# Altium PCB GSM-Board.PcbDoc
Units mm, origin at the board's own origin, x right, y up, seen from the top; angles counter-clockwise.
Board outline 40 x 40 mm, 2 copper layers (Top Layer, Bottom Layer), stack 1.571 mm thick; 22 components, 23 nets, 164 pads, 4 vias.
Unrouted connection lines stored in the file: 47.
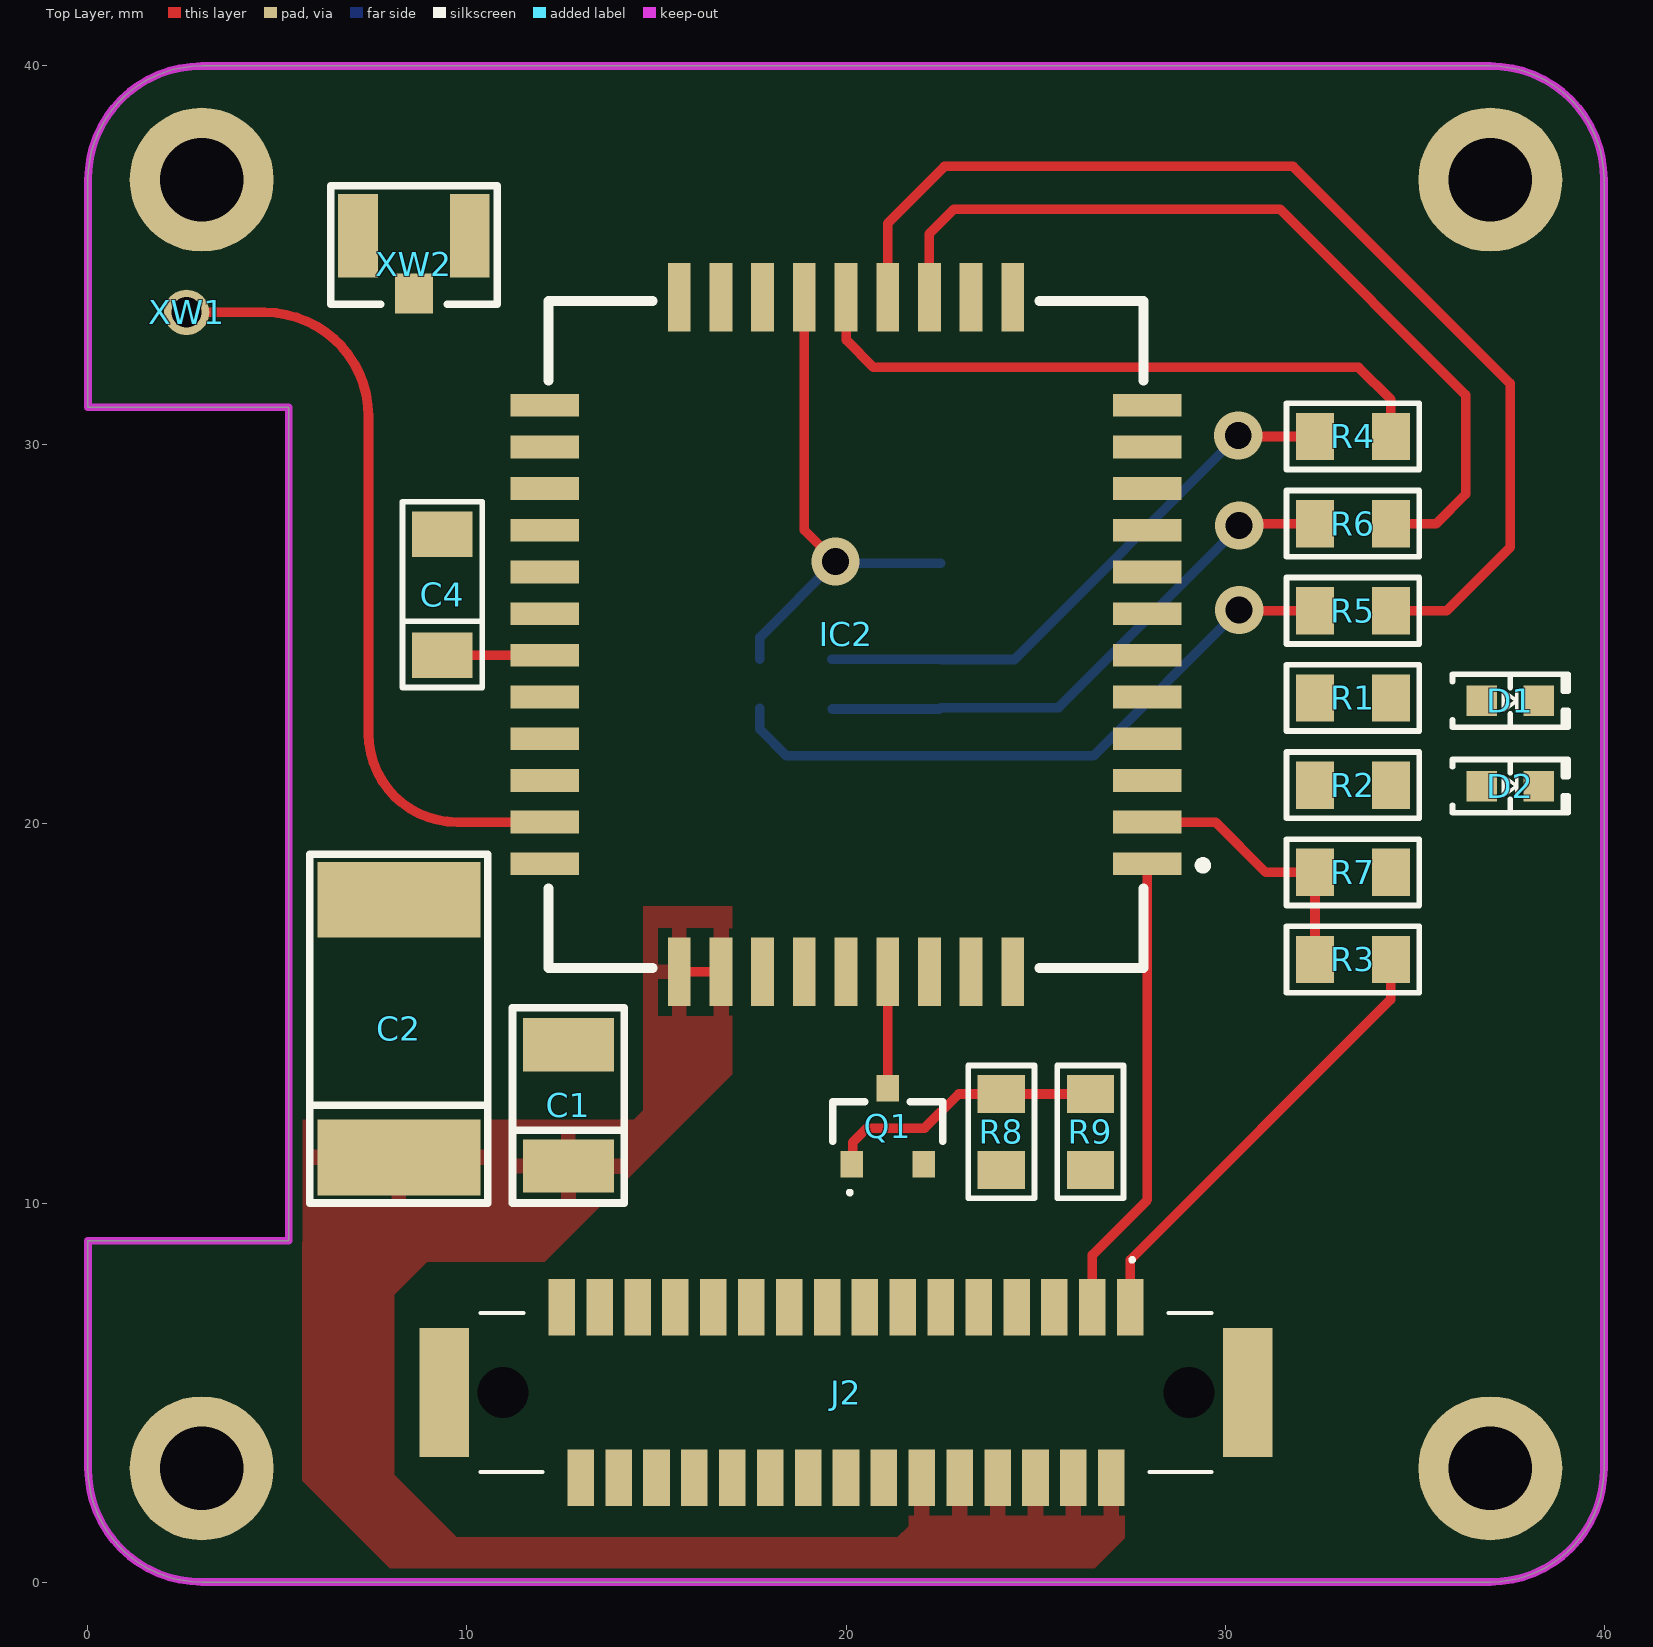
[diagram p0: Top Layer view]
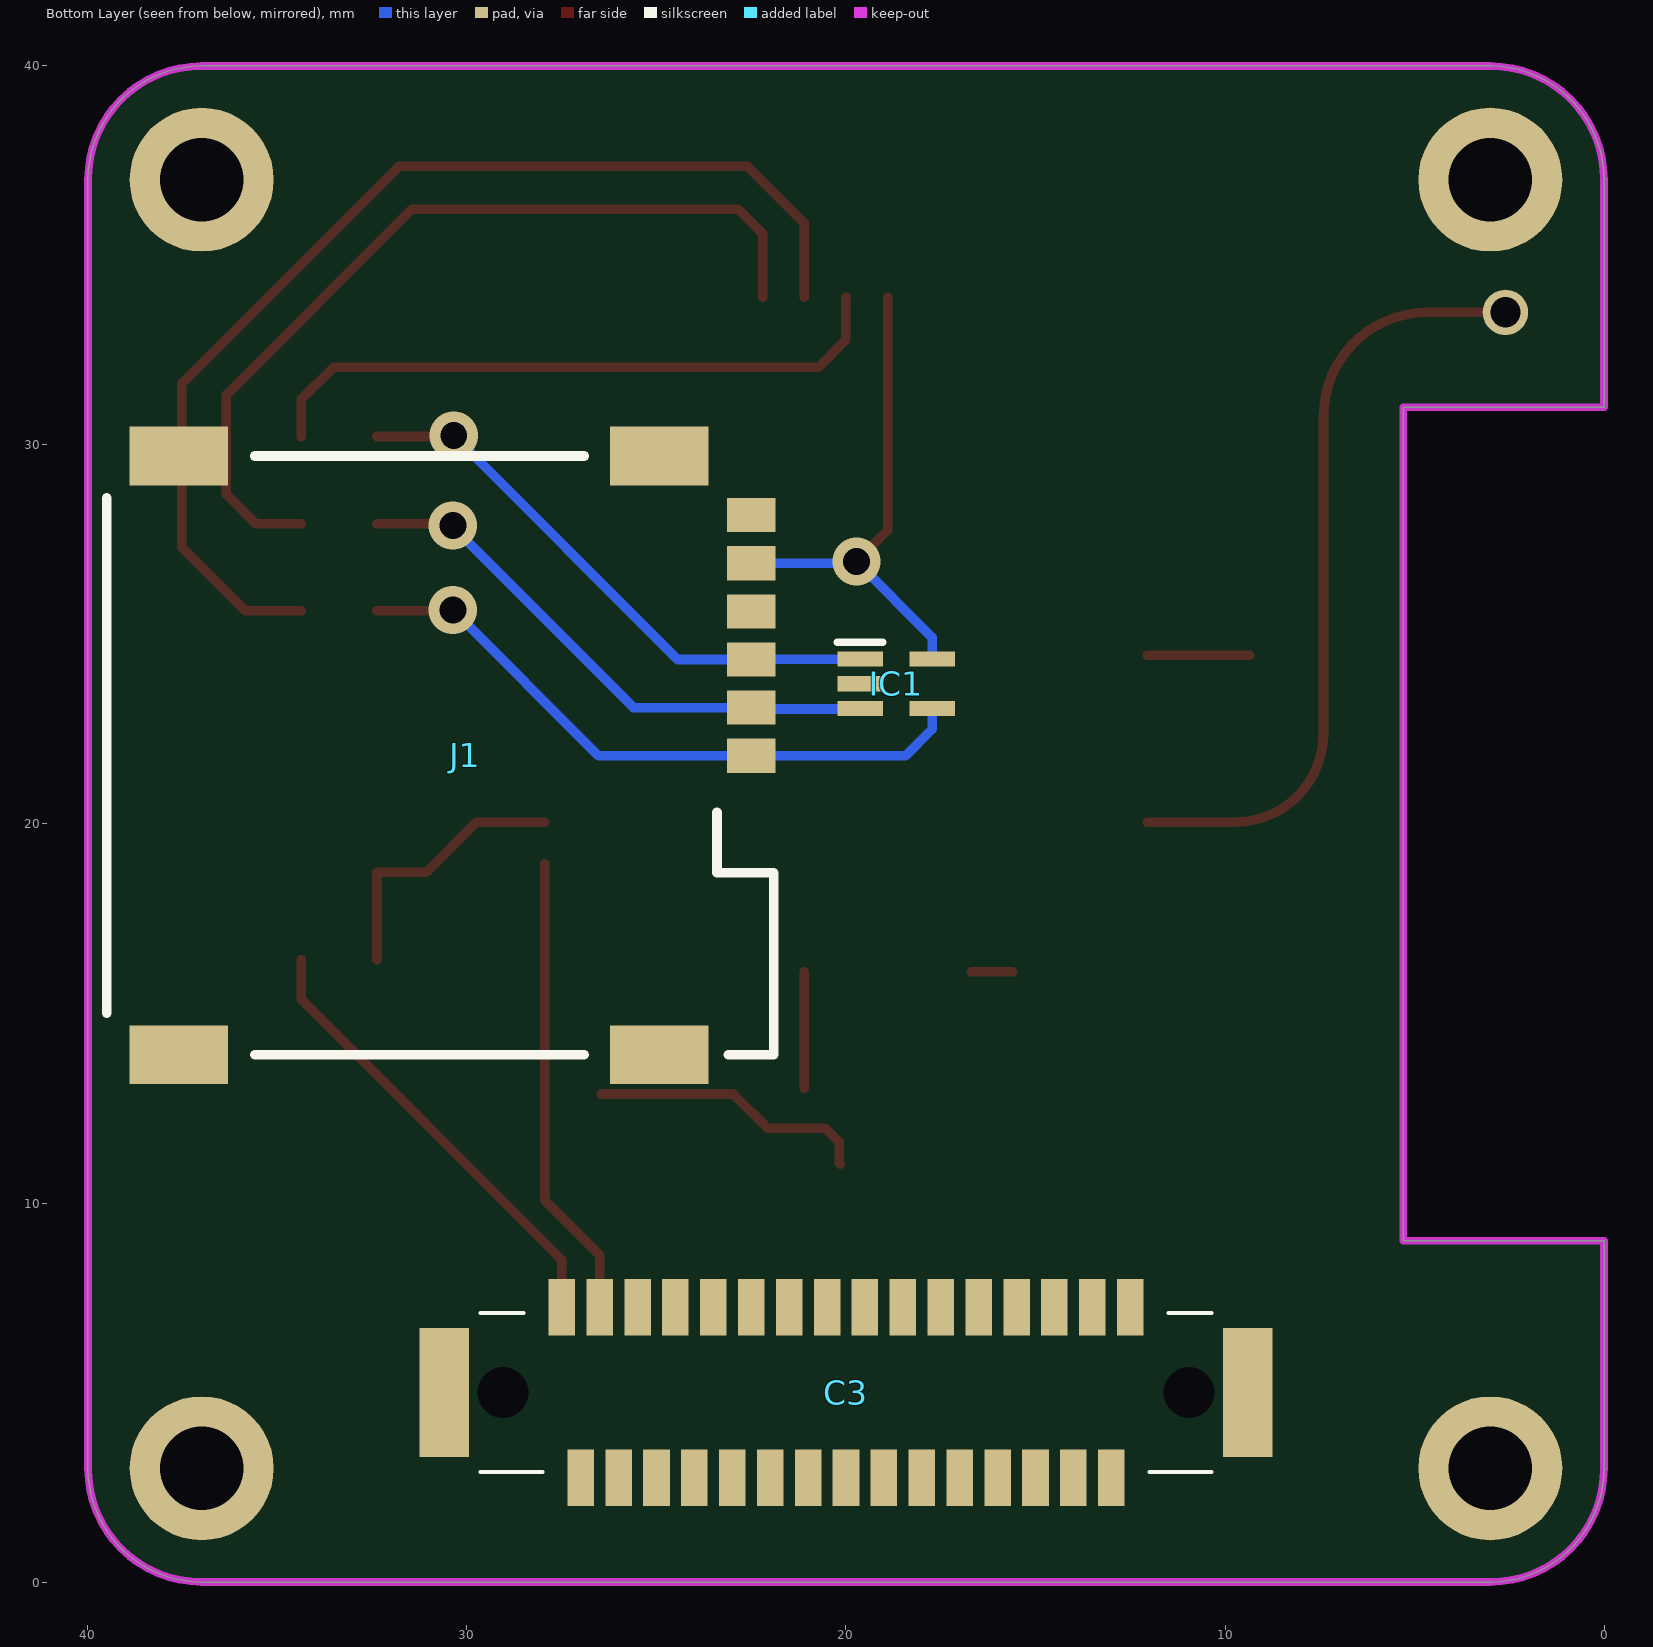
[diagram p1: Bottom Layer view, seen from below]

## Layer stack, top to bottom
Top Solder: solder mask 0.0102, Solder Resist, Dk 3.5
Top Layer: signal copper 0.0356
Dielectric 1: dielectric 1.5, FR-4, Dk 4.8
Bottom Layer: signal copper 0.0356
Bottom Solder: solder mask 0.0102, Solder Resist, Dk 3.5

## Board outline
0,3.8 0,9 5.3,9 5.3,31 0,31 0,37 cw(c3,37) 3,40 37,40 cw(c37,37) 40,37 40,3 cw(c37,3) 37,0 3,0 cw(c3,3) 0,3

## Design rules (kind name [scope] priority, off if disabled: settings)
Clearance [All] p1: gap=0.254 ignorepadtopadclearanceinfootprint=FALSE except(0: Arc-Hole Track-Hole SMDPad-Hole THPad-Hole Via-Hole Fill-Hole Poly-Hole Region-Hole Text-Hole)
ComponentClearance [All] p1: gap=0 collisioncheckmode=3 verticalgap=0 showdistances=FALSE
PolygonConnect PolygonConnect_1 [All vs InNet('VCC')] p1: connectstyle=Relief reliefconductorwidth=0.4 reliefentries=4 polygonreliefangle="90 Angle" airgapwidth=0.254
PolygonConnect [All] p2: connectstyle=Relief reliefconductorwidth=0.254 reliefentries=4 polygonreliefangle="90 Angle" airgapwidth=0.254
RoutingVias [All] p1: holewidth=0.711 width=1.27 viastyle="Through Hole" minholewidth=0.711 minwidth=1.27 maxholewidth=0.711 maxwidth=1.27
SolderMaskExpansion [All] p1: expansion=0.102 istentingtop=FALSE
Width VCC [InNet('VCC')] p1: maxlimit=0.5 minlimit=0.254 preferedwidth=0.254
Width [All] p2: maxlimit=0.254 minlimit=0.254 preferedwidth=0.254
29 further rules are at their usual default settings.

## Classes and differential pairs
component class GSM-Board: C1 C2 C4 D1 D2 IC1 IC2 J1 Q1 R1 R2 R3 R4 R5 R6 R7 R8 R9 XW1 XW2

## Components (designator, comment, footprint, x,y, rotation, side; value= is the part's Value field where it differs from the comment)
C1 "10uF" "CAP: TANTAL-B" 12.675,12.575 r90 top
C2 "100uF" "CAP: TANTAL-D" 8.2,14.6 r90 top
C3 "DF9-31S-1V_32_" DF931S1V32 20,5 r0 bottom
C4 "4.7uF" "CAP: TANTAL-A" 9.35,26.05 r90 top
D1 "=VALUE" "LED 0603_1608" 37.525,23.25 r0 top
D2 "=VALUE" "LED 0603_1608" 37.525,21 r0 top
IC1 "ESDALC6V1W5" SOT65P210X110-5N 18.675,23.7 r180 bottom
IC2 "SIM800C" SIM800C 20,25 r180 top
J1 "TFP09-2-12B" SIMHOLDER 37.605,29.71 r270 bottom
J2 "DF9-31P-1V_32_" DF931P1V32 20,5 r180 top
Q1 "BC817-40,215" BC81740215 21.1,12.025 r0 top
R1 "Resistor film, 1k, , 0201, 0.05W, -55...+125°C" "RES: 0805" 33.375,23.325 r0 top value=1k
R2 "Resistor film, 1k, , 0201, 0.05W, -55...+125°C" "RES: 0805" 33.375,21.025 r0 top value=1k
R3 "Resistor film, 1k, , 0201, 0.05W, -55...+125°C" "RES: 0805" 33.375,16.425 r0 top value=1k
R4 "Resistor film, 100R, , 0201, 0.05W, -55...+125°C" "RES: 0805" 33.375,30.225 r180 top value=100R
R5 "Resistor film, 100R, , 0201, 0.05W, -55...+125°C" "RES: 0805" 33.375,25.625 r180 top value=100R
R6 "Resistor film, 100R, , 0201, 0.05W, -55...+125°C" "RES: 0805" 33.375,27.925 r180 top value=100R
R7 "Resistor film, 5.6k, , 0201, 0.05W, -55...+125°C" "RES: 0805" 33.375,18.725 r180 top value=5.6k
R8 "Resistor film, 4.7k, , 0201, 0.05W, -55...+125°C" "RES: 0805" 24.1,11.875 r270 top value=4.7k
R9 "Resistor film, 47k, , 0201, 0.05W, -55...+125°C" "RES: 0805" 26.45,11.875 r90 top value=47k
XW1 "=VALUE" ANT_HOLE 2.6,33.5 r270 top
XW2 "=VALUE" "CON: U.FL" 8.6,35.525 r0 top

## Footprints (in the part's own frame and the unit in brackets; to place one, negate y for a bottom-side part, rotate by r counter-clockwise, add the part's x,y. Pads: shape width x height; smd on the part's side, far side on the other; paste and mask are expansions set on the pad)
ANT_HOLE [mm]
  round 1.2 hole 0.8: 1(0,0)
  body extent -0.4,-2.49 23.59,2.49, height 3.29
BC81740215 [mm]
  rect 0.6x0.7 smd: 1(-0.95,-1) 2(0.95,-1) 3(0,1)
  silkscreen extent -1.45,-1.8 1.45,0.65, body extent -1.45,-1.2 1.45,1.2, height 0.91
"CAP: TANTAL-A" [mm]
  rect 1.2x1.6 smd: 1(-1.6,0) 2(1.6,0)
  silkscreen extent -2.45,-1.05 2.45,1.05, body extent -1.7,-0.84 1.7,0.84, height 1.71
"CAP: TANTAL-B" [mm]
  rect 1.4x2.4 smd: 1(-1.6,0) 2(1.6,0)
  silkscreen extent -2.58,-1.48 2.58,1.48, body extent -1.85,-1.46 1.85,1.47, height 2.03
"CAP: TANTAL-D" [mm]
  rect 2x4.3 smd: 1(-3.4,0) 2(3.4,0)
  silkscreen extent -4.6,-2.35 4.6,2.35, body extent -3.7,-2.22 3.7,2.23, height 3.01
"CON: U.FL" [mm]
  rect 1x1.05 smd: 1(0,-1.525)
  rect 1.05x2.2 smd: 2(-1.475,0) 2(1.475,0)
  silkscreen extent -2.2,-1.81 2.2,1.31, body extent -1.5,-1.71 1.5,1.14, height 1.27
DF931P1V32 [mm]
  rect 0.7x1.5 smd: 1(-7.5,-2.25) 2(-7,2.25) 3(-6.5,-2.25) 4(-6,2.25) 5(-5.5,-2.25) 6(-5,2.25) 7(-4.5,-2.25) 8(-4,2.25) 9(-3.5,-2.25) 10(-3,2.25) 11(-2.5,-2.25) 12(-2,2.25) 13(-1.5,-2.25) 14(-1,2.25) 15(-0.5,-2.25) 16(0,2.25) 17(0.5,-2.25) 18(1,2.25) 19(1.5,-2.25) 20(2,2.25) 21(2.5,-2.25) 22(3,2.25) 23(3.5,-2.25) 24(4,2.25) 25(4.5,-2.25) 26(5,2.25) 27(5.5,-2.25) 28(6,2.25) 29(6.5,-2.25) 30(7,2.25) 31(7.5,-2.25)
  round 0.675 hole 1.35 unplated: MH1(-9.05,0) MH2(9.05,0)
  rect 1.3x3.4 smd: MP1(-10.6,0) MP2(10.6,0)
  silkscreen extent -9.65,-3.55 9.65,2.1, body extent -10.55,-2.81 10.55,2.79, height 3.29
DF931S1V32 [mm]
  rect 0.7x1.5 smd: 1(-7.5,-2.25) 2(-7,2.25) 3(-6.5,-2.25) 4(-6,2.25) 5(-5.5,-2.25) 6(-5,2.25) 7(-4.5,-2.25) 8(-4,2.25) 9(-3.5,-2.25) 10(-3,2.25) 11(-2.5,-2.25) 12(-2,2.25) 13(-1.5,-2.25) 14(-1,2.25) 15(-0.5,-2.25) 16(0,2.25) 17(0.5,-2.25) 18(1,2.25) 19(1.5,-2.25) 20(2,2.25) 21(2.5,-2.25) 22(3,2.25) 23(3.5,-2.25) 24(4,2.25) 25(4.5,-2.25) 26(5,2.25) 27(5.5,-2.25) 28(6,2.25) 29(6.5,-2.25) 30(7,2.25) 31(7.5,-2.25)
  rect 1.3x3.4 smd: MP1(-10.6,0) MP2(10.6,0)
  silkscreen extent -9.65,-2.1 9.65,2.1, body extent -10.55,-2.81 10.55,2.79, height 3.3
"LED 0603_1608" [mm] "Chip Diode, 2-Leads, Body 1.60x0.80mm, IPC Medium Density"
  rect 0.8x0.8 smd: 1(-0.75,0) 2(0.75,0)
  silkscreen extent -1.52,-0.7 1.52,0.7, body extent -0.8,-0.4 0.8,0.4, height 0.53
"RES: 0805" [mm]
  rect 1x1.25 smd: 1(-1,0) 2(1,0)
  silkscreen extent -1.75,-0.87 1.75,0.87, body extent -1,-0.6 1,0.6, height 0.48
SIM800C [mm]
  rect 1.8x0.6 smd: 1(-7.95,6.05) 2(-7.95,4.95) 3(-7.95,3.85) 4(-7.95,2.75) 5(-7.95,1.65) 6(-7.95,0.55) 7(-7.95,-0.55) 8(-7.95,-1.65) 9(-7.95,-2.75) 10(-7.95,-3.85) 11(-7.95,-4.95) 12(-7.95,-6.05) 22(7.95,-6.05) 23(7.95,-4.95) 24(7.95,-3.85) 25(7.95,-2.75) 26(7.95,-1.65) 27(7.95,-0.55) 28(7.95,0.55) 29(7.95,1.65) 30(7.95,2.75) 31(7.95,3.85) 32(7.95,4.95) 33(7.95,6.05)
  rect 0.6x1.8 smd: 13(-4.4,-8.9) 14(-3.3,-8.9) 15(-2.2,-8.9) 16(-1.1,-8.9) 17(0,-8.9) 18(1.1,-8.9) 19(2.2,-8.9) 20(3.3,-8.9) 21(4.4,-8.9) 34(4.4,8.9) 35(3.3,8.9) 36(2.2,8.9) 37(1.1,8.9) 38(0,8.9) 39(-1.1,8.9) 40(-2.2,8.9) 41(-3.3,8.9) 42(-4.4,8.9)
  silkscreen extent -9.51,-8.8 7.85,8.8, body extent -7.85,-8.8 7.85,8.8, height 2.3
SIMHOLDER [mm]
  rect 0.9x1.27 smd: 1(2.83,15.105) 2(5.37,15.105) 3(7.91,15.105) 5(1.56,15.105) 6(4.1,15.105) 7(6.64,15.105)
  rect 1.55x2.6 smd: MP1(0,0) MP2(15.8,0) MP3(0,12.68) MP4(15.8,12.68)
  silkscreen extent 0,-1.9 15.8,15.7, body extent -0.13,-1.65 15.97,13.55, height 1.85
SOT65P210X110-5N [mm]
  rect 1.2x0.4 smd: 1(-0.95,0.65) 2(-0.95,0) 3(-0.95,-0.65) 4(0.95,-0.65) 5(0.95,0.65)
  silkscreen extent -1.55,1.1 -0.35,1.1, body extent -1.05,-1 1.05,1, height 1.1

## Part data
C1 C2 C4: library part Capacitor_polar, "SMD Capacitor Polar"
C3: "Connector", Arrow Part Number=DF9-31S-1V(32), Manufacturer_Name=Hirose, Mouser Part Number=798-DF9-31S-1V32, Arrow Price/Stock=https://www.arrow.com/en/products/df9-31s-1v-32/hirose-electric, Datasheet Link=http://www.mouser.com/ds/2/185/DF9_catalog-939217.pdf, Height=3.3mm, Manufacturer_Part_Number=DF9-31S-1V(32), Mouser Price/Stock=https://www.mouser.co.uk/ProductDetail/Hirose-Connector/DF9-31S-1V32?qs=zOgoZG1CgI88k8P2oY2QVw%3D%3D
D1 D2: library part LED, "Chip LED"
IC1: "Integrated Circuit", Manufacturer_Name=STMicroelectronics, Mouser Part Number=511-ESDALC6V1W5, Arrow Part Number=ESDALC6V1W5, Arrow Price/Stock=https://www.arrow.com/en/products/esdalc6v1w5/stmicroelectronics?region=nac, Datasheet Link=http://www.st.com/web/en/resource/technical/document/datasheet/CD00002946.pdf, Height=1.1mm, Manufacturer_Part_Number=ESDALC6V1W5, Mouser Price/Stock=https://www.mouser.co.uk/ProductDetail/STMicroelectronics/ESDALC6V1W5?qs=C%2FEejvvdwQ4xcyFnfrFaDw%3D%3D
IC2: library part -SIM800C, "Integrated Circuit", Manufacturer_Name=SIMCOM, Datasheet Link=https://datasheet.lcsc.com/szlcsc/SIMCom-Wireless-Solutions-SIM800C-24Mbit_C69119.pdf, Manufacturer_Part_Number=-SIM800C
J1: "Connector", Manufacturer_Name=100y, Datasheet Link=http://images.100y.com.tw/pdf_file/10-TFP09-2-12B.pdf, Height=2.45mm, Manufacturer_Part_Number=TFP09-2-12B
J2: "Connector", Arrow Part Number=DF9-31P-1V(32), Manufacturer_Name=Hirose, Mouser Part Number=798-DF9-31P-1V32, Arrow Price/Stock=https://www.arrow.com/en/products/df9-31p-1v-32/hirose-electric, Datasheet Link=https://datasheet.datasheetarchive.com/originals/distributors/SFDatasheet-7/sf-000141250.pdf, Height=3.5mm, Manufacturer_Part_Number=DF9-31P-1V(32), Mouser Price/Stock=https://www.mouser.co.uk/ProductDetail/Hirose-Connector/DF9-31P-1V32?qs=zOgoZG1CgI9P5hPtT7oVcw%3D%3D
Q1: "Transistor BJT NPN", Manufacturer_Name=Nexperia, Mouser Part Number=771-BC817-40-T/R, Arrow Part Number=BC817-40,215, Arrow Price/Stock=https://www.arrow.com/en/products/bc817-40215/nexperia?region=nac, Datasheet Link=https://assets.nexperia.com/documents/data-sheet/BC817_SER.pdf, Height=1.1mm, Manufacturer_Part_Number=BC817-40,215, Mouser Price/Stock=https://www.mouser.co.uk/ProductDetail/Nexperia/BC817-40215?qs=me8TqzrmIYU%252B245p8hOLaQ%3D%3D
R1 R2 R3 R4 R5 R6 R7 R8 R9: library part Resistor, Manufacturer=Yageo, Package=0201, PartNumber=RC0201JR-07100RL, Power=0.05W, Temperature=-55...+125°C, TypeResistor="Resistor film", HelpURL=https://www.digikey.com/product-detail/en/yageo/RC0201JR-07100RL/311-100NCT-ND/1949006
  R1 R2 R3: ValueManufacturerPartNumber="Resistor film, 1k, , 0201, 0.05W, -55...+125°C"
  R4 R5 R6: ValueManufacturerPartNumber="Resistor film, 100R, , 0201, 0.05W, -55...+125°C"
  R7: ValueManufacturerPartNumber="Resistor film, 5.6k, , 0201, 0.05W, -55...+125°C"
  R8: ValueManufacturerPartNumber="Resistor film, 4.7k, , 0201, 0.05W, -55...+125°C"
  R9: ValueManufacturerPartNumber="Resistor film, 47k, , 0201, 0.05W, -55...+125°C"
XW1 XW2: library part "Connector RF"

## Free pads (board coordinates)
  round 3.8 hole 2.2: 5(3,3) 5(3,37) 5(37,3) 5(37,37)

## Via types
v1: diameter 1.27, hole 0.711, Top Layer to Bottom Layer, 4 vias

## Nets (pads, with @x,y where several pads share a name; then routed paths per layer and width w, separated by ;. In a path a pad name is that pad's centre, name@x,y a point inside that pad or via, vN(x,y) a via of type N, cw(c..) or ccw(c..) an arc to the next point about the centre after c; other vN are vias at no path point)
GND: C1.2 C2.2 C3.2 C3.4 C3.6 C3.8 C3.10 C3.12 C4.2 D1.2 D2.2 IC1.2 IC2.8 IC2.13 IC2.19 IC2.21 IC2.27 IC2.30 IC2.31 IC2.33 IC2.36 IC2.37 J1.5 J1.MP1 J1.MP2 J1.MP3 J1.MP4 J2.20 J2.22 J2.24 J2.26 J2.28 J2.30 Q1.2 R7.1 R9.1
NetC4_1: C4.1 IC2.28 | length 2.7
  Top Layer w0.254: C4.1 IC2.28
NetD1_1: D1.1 R1.2
NetD2_1: D2.1 R2.2
NetIC1_1: IC1.1 J1.2 R4.2 | length 15.2
  Top Layer w0.254: v1(30.35,30.25) 30.375,30.225 R4.2
  Bottom Layer w0.254: IC1.1 J1.2@22.49,24.35 ; J1.2 24.44,24.34 v1(30.35,30.25)
NetIC1_3: IC1.3 J1.7 R6.2 | length 14.8
  Top Layer w0.254: v1(30.375,27.875) 30.425,27.925 R6.2
  Bottom Layer w0.254: IC1.3@19.641,23.034 22.464,23.034 J1.7 25.606,23.07 30.375,27.839 v1(30.375,27.875)
NetIC1_4: IC1.4 J1.3 R5.2 | length 17.1
  Top Layer w0.254: v1(30.375,25.65) 30.4,25.625 R5.2
  Bottom Layer w0.254: IC1.4 17.725,22.5 18.425,21.8 J1.3 26.525,21.8 v1(30.375,25.65)
NetIC2_2: IC2.2 R3.1 R7.2 | length 7.3
  Top Layer w0.254: IC2.2 29.75,20.05 31.075,18.725 R7.2 R3.1
NetIC2_32: IC2.32 XW1.1 XW2.1 | length 20.7
  Top Layer w0.254: XW1.1 4.66,33.5 cw(c4.66,30.76) 7.4,30.76 7.4,22.39 ccw(c9.74,22.39) 9.74,20.05 IC2.32
NetIC2_41: IC2.41 R1.1
NetIC2_42: IC2.42 R2.1
NetQ1_1: Q1.1 R8.1 R9.2 | length 7.4
  Top Layer w0.254: Q1.1 20.182,11.057 20.182,11.607 20.55,11.975 22.075,11.975 22.975,12.875 R8.1 R9.2
PWRKEY: IC2.39 Q1.3 | length 3.1
  Top Layer w0.254: Q1.3 IC2.39
PWRKEY_MCU: C3.1 J2.31 R8.2
SIM_CLK: IC2.16 R5.1 | length 29.5
  Top Layer w0.254: IC2.16 21.1,35.85 22.6,37.35 31.8,37.35 37.525,31.625 37.525,27.3 35.85,25.625 R5.1
SIM_DATA: IC2.15 R6.1 | length 23
  Top Layer w0.254: IC2.15 22.2,35.576 22.849,36.225 31.45,36.225 36.35,31.325 36.35,28.7 35.575,27.925 R6.1
SIM_RST: IC2.17 R4.1 | length 17.1
  Top Layer w0.254: IC2.17 20.007,33.893 20.007,32.768 20.725,32.05 33.525,32.05 34.375,31.2 R4.1
SIM_VDD: IC1.5 IC2.18 J1.1 | length 13.5
  Top Layer w0.254: IC2.18 18.9,27.75 v1(19.725,26.925)
  Bottom Layer w0.254: IC1.5 17.725,24.925 v1(19.725,26.925) 19.77,26.88 J1.1
UART1_RX: C3.25 J2.7
UART1_TX: C3.27 J2.5
UART6_RX: C3.29 IC2.1 J2.3 | length 12.3
  Top Layer w0.254: J2.3 26.5,8.634 27.95,10.084 IC2.1
UART6_TX: C3.31 J2.1 R3.2 | length 12
  Top Layer w0.254: J2.1 27.5,8.5 34.371,15.371 R3.2@34.371,16.421
VCC: C1.1 C2.1 C3.20 C3.22 C3.24 C3.26 C3.28 C3.30 IC2.34 IC2.35 J2.2 J2.4 J2.6 J2.8 J2.10 J2.12 | length 1.1
  Top Layer w0.254: IC2.34 IC2.35
pads on no net: C3.3 C3.5 C3.7 C3.9 C3.11 C3.13 C3.14 C3.15 C3.16 C3.17 C3.18 C3.19 C3.21 C3.23 C3.MP1 C3.MP2 IC2.3 IC2.4 IC2.5 IC2.6 IC2.7 IC2.9 IC2.10 IC2.11 IC2.12 IC2.14 IC2.20 IC2.22 IC2.23 IC2.24 IC2.25 IC2.26 IC2.29 IC2.38 IC2.40 J1.6 J2.9 J2.11 J2.13 J2.14 J2.15 J2.16 J2.17 J2.18 J2.19 J2.21 J2.23 J2.25 J2.27 J2.29 J2.MH1 J2.MH2 J2.MP1 J2.MP2 XW2.2

## Polygon pours and split planes (outlines as drawn)
VCC on Top Layer "NONET_L-01_P-001" (solid, pour order 0): 17,17.825 14.65,17.825 14.65,12.45 14.4,12.2 13.35,12.2 5.65,12.2 5.65,2.675 8.175,0.15 26.35,0.15 27.35,1.15 27.35,3.5 21.65,3.5 21.65,1.475 21.35,1.175 9.725,1.175 8.075,2.825 8.075,7.575 8.95,8.45 12.05,8.45 17,13.4

## Keep-outs
Keep-Out Layer:
  lines w0.2: 0,3 ccw(c3,3) 3,0 37,0 ccw(c37,3) 40,3 40,37 ccw(c37,37) 37,40 3,40 ccw(c3,37) 0,37 0,31 5.3,31 5.3,26.9 5.3,9 0,9 0,3.8 0,3